# EAGLE board mainboard_rev_b (EAGLE 6.2)
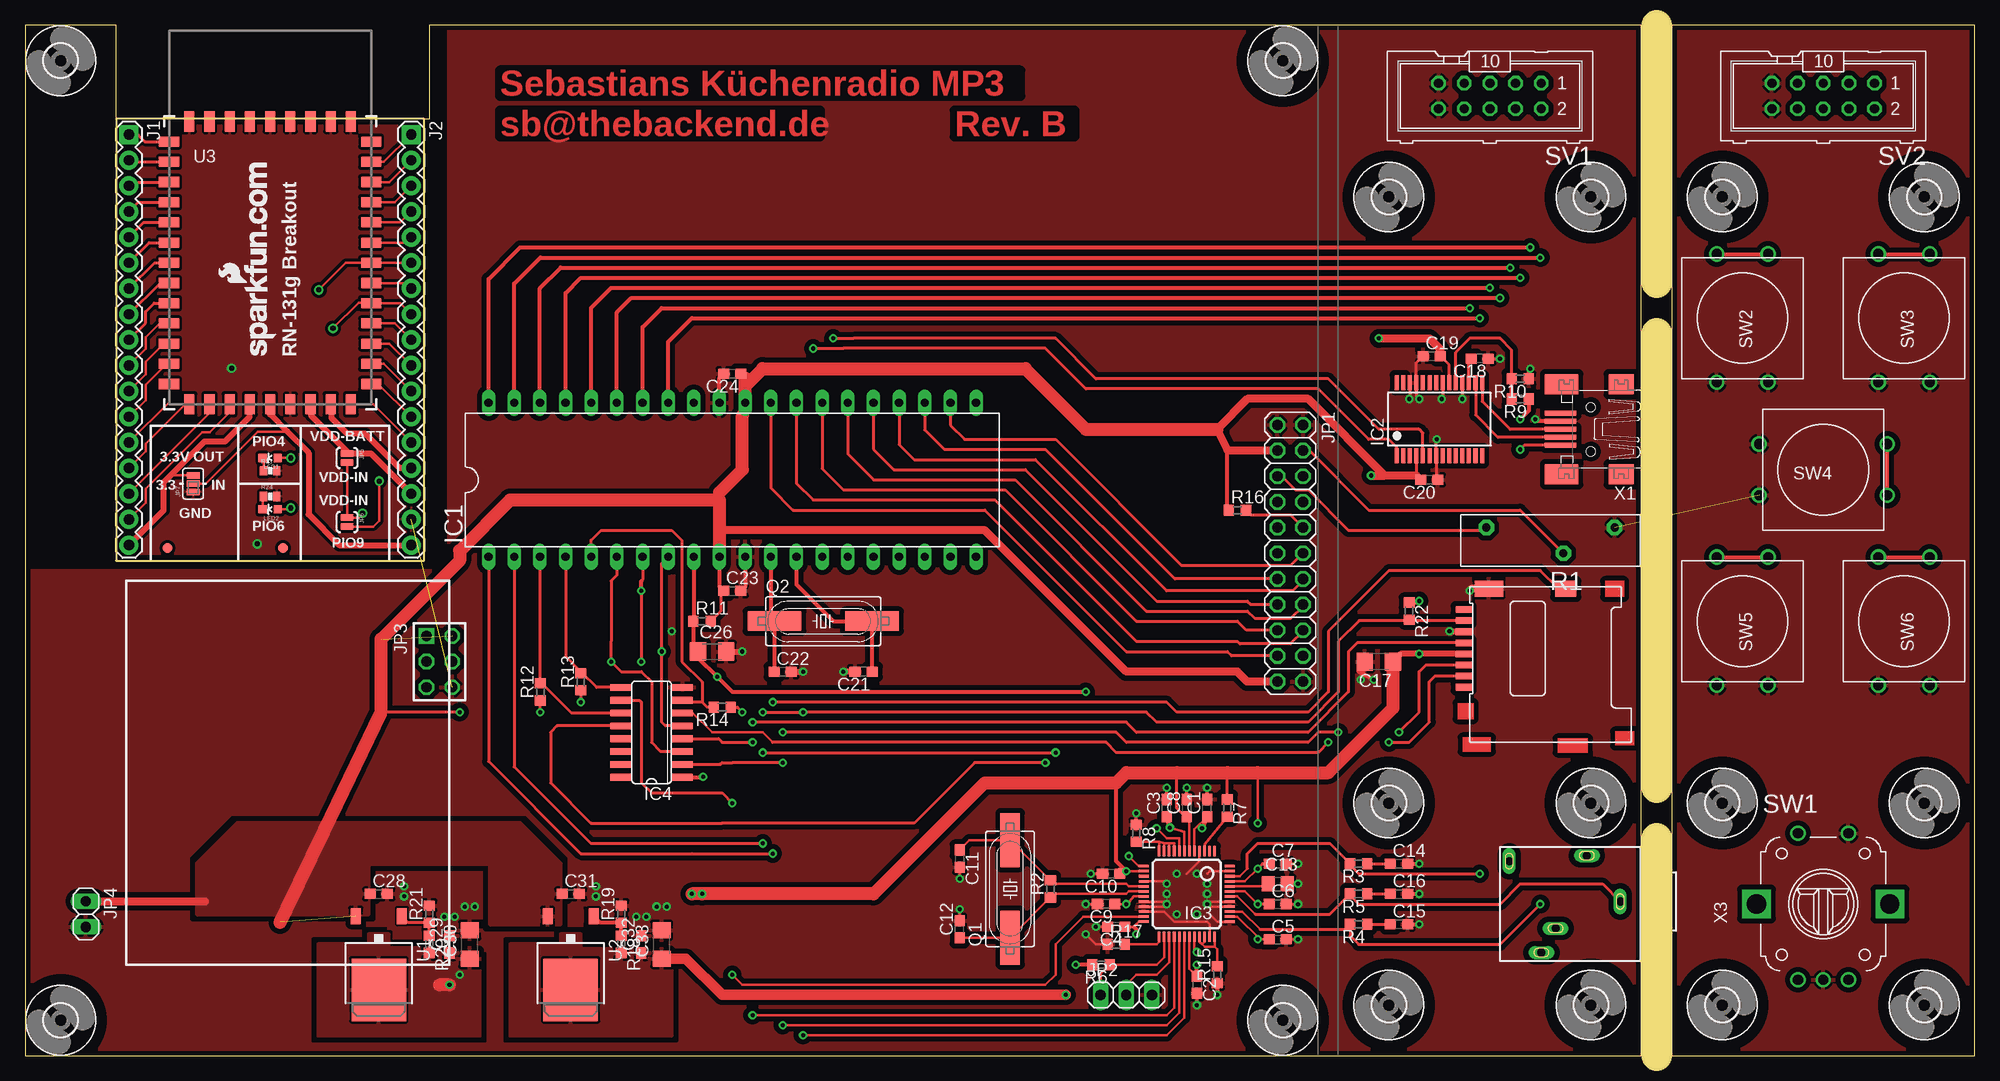
[diagram p0: board, top side]
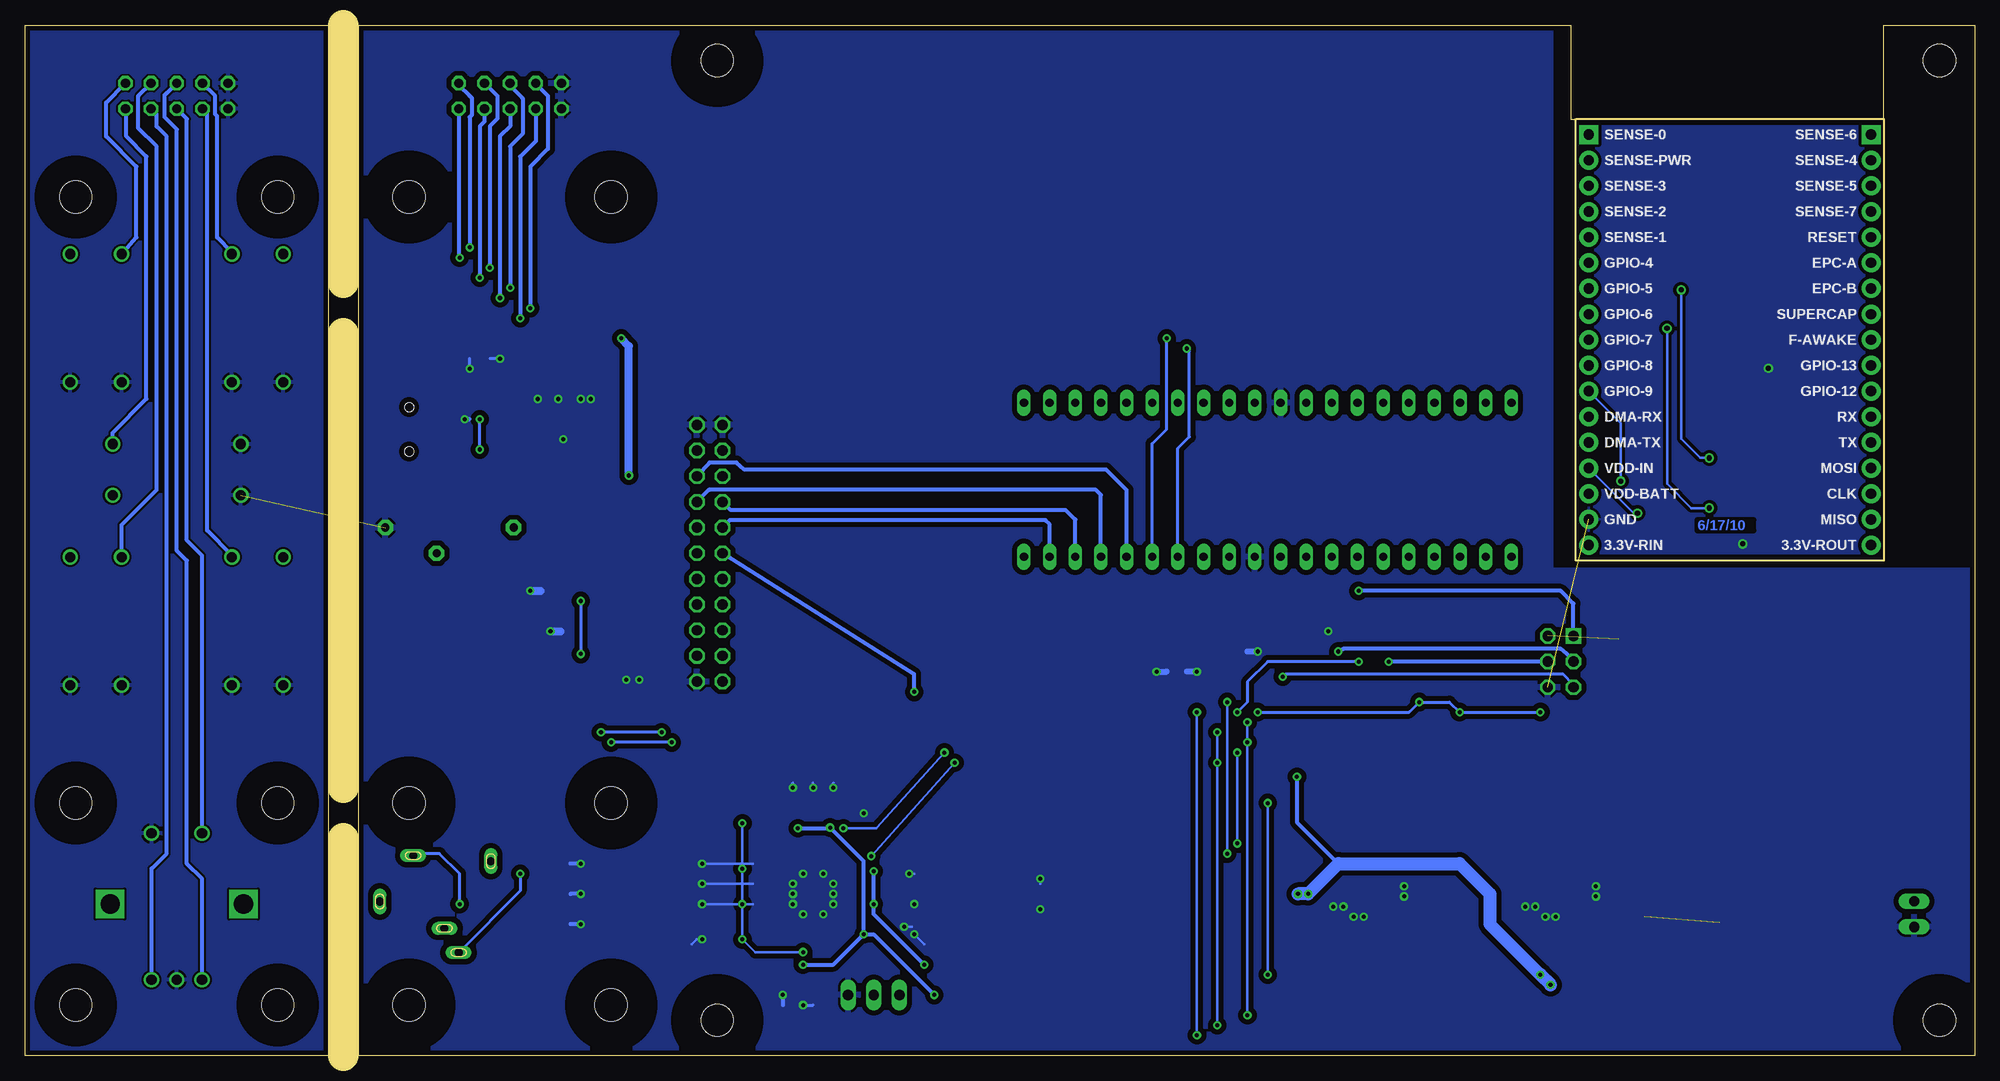
[diagram p1: board, bottom side, seen from below]

Size 193 x 102 mm. Coordinates in mm from the lower left corner, seen from the top.
Outline: 9,92.7 40,92.7 40,102 160,102 160,0 0,0 0,102 9,102 9,92.7
Outline: 9,92.7 9,92.72 39.48,92.72 39.48,49 9,49 9,92.7
Outline: 163,0 193,0 193,102 163,102 163,0
Copper layers (1*16): Top 0.035mm / dielectric 1.5mm / Bottom 0.035mm
Design rules "default *": minimum track width 0.2mm, minimum drill 0.4mm, track to track 0.2mm, track to pad 0.2mm, pad to pad 0.2mm, via to via 0.2mm, smd to smd 0mil, copper to edge 0.5mm, drill to drill 0.5mm, minimum pad ring 10mil, minimum via ring 8mil, stop-mask expansion 4mil, vias tented up to drill 0mil, thermal gap 10mil
Milling: 3 lines

## Footprints (pad centres in the part's own frame; a part is rotated, then mirrored left to right if it is on the bottom)
C0603 = smd 1.1 x 1: 1 -0.85,0; 2 0.85,0
C0805 = smd 1.3 x 1.5: 1 -0.95,0; 2 0.95,0
C1206 = smd 1.6 x 1.8: 1 -1.4,0; 2 1.4,0
3,2 = hole 3.2: 0,0
DIL40 = drill 0.813 long: 1 -24.13,-7.62; 2 -21.59,-7.62; 3 -19.05,-7.62; 4 -16.51,-7.62; 5 -13.97,-7.62; 6 -11.43,-7.62; 7 -8.89,-7.62; 8 -6.35,-7.62; 9 -3.81,-7.62; 10 -1.27,-7.62; 11 1.27,-7.62; 12 3.81,-7.62; 13 6.35,-7.62; 14 8.89,-7.62; 15 11.43,-7.62; 16 13.97,-7.62; 17 16.51,-7.62; 18 19.05,-7.62; 19 21.59,-7.62; 20 24.13,-7.62; 21 24.13,7.62; 22 21.59,7.62; 23 19.05,7.62; 24 16.51,7.62; 25 13.97,7.62; 26 11.43,7.62; 27 8.89,7.62; 28 6.35,7.62; 29 3.81,7.62; 30 1.27,7.62; 31 -1.27,7.62; 32 -3.81,7.62; 33 -6.35,7.62; 34 -8.89,7.62; 35 -11.43,7.62; 36 -13.97,7.62; 37 -16.51,7.62; 38 -19.05,7.62; 39 -21.59,7.62; 40 -24.13,7.62
SSOP28 = smd 0.4 x 1.5: 1 -4.225,-3.625; 2 -3.575,-3.625; 3 -2.925,-3.625; 4 -2.275,-3.625; 5 -1.625,-3.625; 6 -0.975,-3.625; 7 -0.325,-3.625; 8 0.325,-3.625; 9 0.975,-3.625; 10 1.625,-3.625; 11 2.275,-3.625; 12 2.925,-3.625; 13 3.575,-3.625; 14 4.225,-3.625; 15 4.225,3.625; 16 3.575,3.625; 17 2.925,3.625; 18 2.275,3.625; 19 1.625,3.625; 20 0.975,3.625; 21 0.325,3.625; 22 -0.325,3.625; 23 -0.975,3.625; 24 -1.625,3.625; 25 -2.275,3.625; 26 -2.925,3.625; 27 -3.575,3.625; 28 -4.225,3.625
LQFP-48 = smd 0.25 x 1: 1 -2.75,-4.25; 2 -2.25,-4.25; 3 -1.75,-4.25; 4 -1.25,-4.25; 5 -0.75,-4.25; 6 -0.25,-4.25; 7 0.25,-4.25; 8 0.75,-4.25; 9 1.25,-4.25; 10 1.75,-4.25; 11 2.25,-4.25; 12 2.75,-4.25; 25 2.75,4.25; 26 2.25,4.25; 27 1.75,4.25; 28 1.25,4.25; 29 0.75,4.25; 30 0.25,4.25; 31 -0.25,4.25; 32 -0.75,4.25; 33 -1.25,4.25; 34 -1.75,4.25; 35 -2.25,4.25; 36 -2.75,4.25 | smd 1 x 0.25: 13 4.25,-2.75; 14 4.25,-2.25; 15 4.25,-1.75; 16 4.25,-1.25; 17 4.25,-0.75; 18 4.25,-0.25; 19 4.25,0.25; 20 4.25,0.75; 21 4.25,1.25; 22 4.25,1.75; 23 4.25,2.25; 24 4.25,2.75; 37 -4.25,2.75; 38 -4.25,2.25; 39 -4.25,1.75; 40 -4.25,1.25; 41 -4.25,0.75; 42 -4.25,0.25; 43 -4.25,-0.25; 44 -4.25,-0.75; 45 -4.25,-1.25; 46 -4.25,-1.75; 47 -4.25,-2.25; 48 -4.25,-2.75
SO16 = smd 0.66 x 2.032: 1 -4.445,-3.073; 2 -3.175,-3.073; 3 -1.905,-3.073; 4 -0.635,-3.073; 5 0.635,-3.073; 6 1.905,-3.073; 7 3.175,-3.073; 8 4.445,-3.073; 9 4.445,3.073; 10 3.175,3.073; 11 1.905,3.073; 12 0.635,3.073; 13 -0.635,3.073; 14 -1.905,3.073; 15 -3.175,3.073; 16 -4.445,3.073
1X17 = drill 1.016 pad 1.88 square: 1 0,0 | drill 1.016 pad 1.88: 2 2.54,0; 3 5.08,0; 4 7.62,0; 5 10.16,0; 6 12.7,0; 7 15.24,0; 8 17.78,0; 9 20.32,0; 10 22.86,0; 11 25.4,0; 12 27.94,0; 13 30.48,0; 14 33.02,0; 15 35.56,0; 16 38.1,0; 17 40.64,0
2X11 = drill 1.016 octagon: 1 -12.7,-1.27; 2 -12.7,1.27; 3 -10.16,-1.27; 4 -10.16,1.27; 5 -7.62,-1.27; 6 -7.62,1.27; 7 -5.08,-1.27; 8 -5.08,1.27; 9 -2.54,-1.27; 10 -2.54,1.27; 11 0,-1.27; 12 0,1.27; 13 2.54,-1.27; 14 2.54,1.27; 15 5.08,-1.27; 16 5.08,1.27; 17 7.62,-1.27; 18 7.62,1.27; 19 10.16,-1.27; 20 10.16,1.27; 21 12.7,-1.27; 22 12.7,1.27
1X03 = drill 1.016 long: 1 -2.54,0; 2 0,0; 3 2.54,0
AVR-ISP-6 = drill 1.016 square: 1 -2.54,-1.27 | drill 1.016 octagon: 2 -2.54,1.27; 3 0,-1.27; 4 0,1.27; 5 2.54,-1.27; 6 2.54,1.27
1X02 = drill 1.016 long: 1 -1.27,0; 2 1.27,0
SJ_2S-NO = smd 0.635 x 1.27: 1 -0.45,0; 2 0.45,0
SJ_3_PASTE1&2 = smd 0.635 x 1.27: 1 -0.813,0; 2 0,0; 3 0.813,0
LED-0603 = smd 0.8 x 0.8: A 0,-0.75; C 0,0.75
HC49UP = smd 5.334 x 1.93: 1 -4.826,0; 2 4.826,0
PT-SPIN = drill 0.813 pad 1.524 octagon: 1 -6.35,-1.27; 2 6.35,-1.27; 3 -1.27,1.27
R0603 = smd 1 x 1.1: 1 -0.85,0; 2 0.85,0
0402-RES = smd 0.7 x 0.9: 1 -0.65,0; 2 0.65,0
ML10 = drill 0.914 octagon: 1 -5.08,-1.27; 2 -5.08,1.27; 3 -2.54,-1.27; 4 -2.54,1.27; 5 0,-1.27; 6 0,1.27; 7 2.54,-1.27; 8 2.54,1.27; 9 5.08,-1.27; 10 5.08,1.27
PEC12_INCREMENTAL_ENCODER = drill 1: A -2.5,-7.5; B 2.5,-7.5; C 0,-7.5; P1 -2.5,7; P2 2.5,7 | drill 1.9 square: GND@1 -6.6,0; GND@2 6.6,0
PUSHBUTTON_12X12 = drill 1: A@1 -6.35,2.54; A@2 -6.35,-2.54; B@1 6.35,2.54; B@2 6.35,-2.54
TO252 = smd 1 x 1.6: 1 -2.28,-4.8; 2 2.28,-4.8 | smd 5.4 x 6.2: 3 0,2.5
RN-131G = smd 2 x 1: P$1 -10,11; P$2 -10,9; P$3 -10,7; P$4 -10,5; P$5 -10,3; P$6 -10,1; P$7 -10,-1; P$8 -10,-3; P$9 -10,-5; P$10 -10,-7; P$11 -10,-9; P$12 -10,-11; P$13 -10,-13; P$23 10,-13; P$24 10,-11; P$25 10,-9; P$26 10,-7; P$27 10,-5; P$28 10,-3; P$29 10,-1; P$30 10,1; P$31 10,3; P$32 10,5; P$33 10,7; P$34 10,9; P$35 10,11 | smd 1 x 2: P$14 -8,-15; P$15 -6,-15; P$16 -4,-15; P$17 -2,-15; P$18 0,-15; P$19 2,-15; P$20 4,-15; P$21 6,-15; P$22 8,-15; P$36 8,13; P$37 6,13; P$38 4,13; P$39 2,13; P$40 0,13; P$41 -2,13; P$42 -4,13; P$43 -6,13; P$44 -8,13
FIDUCIAL-1X2 = smd 1 x 1: 1 0,0
32005-301 = smd 3.1 x 0.5: 1 3,1.6; 2 3,0.8; 3 3,0; 4 3,-0.8; 5 3,-1.6 | smd 2.5 x 2: M1 -3,-4.45; M2 -3,4.45 | smd 3.3 x 2: M3 2.9,4.45; M4 2.9,-4.45 | hole 0.9: 0,2.2; 0,-2.2
MICRO-SD = smd 0.65 x 1.6: 1 -10.54,16.6; 2 -9.44,16.6; 3 -8.34,16.6; 4 -7.24,16.6; 5 -6.14,16.6; 6 -5.04,16.6; 7 -3.94,16.6; 8 -2.84,16.6 | smd 1.6 x 2.1: K1 -0.8,6.5 | smd 1.6 x 2.8: K2 -0.8,14.1
1503_09 = drill 0.8 pad 1.2 long: 1 0,-2.1; 2 -4.55,-5.4; 3 5.05,-9.9; 4 -4,-13.1; 5 2.65,-8.5

## Placement (x,y rotation side)
C1  100n  [C0603]  117,24.5 90 top
C2  100n  [C0603]  116,7 270 top
C3  100n  [C0603]  113,24.5 90 top
C4  100n  [C0603]  108,12.75 180 top
C5  100n  [C0603]  124,11.5 0 top
C6  100n  [C0603]  124,15 0 top
C7  100n  [C0603]  124,19 0 top
C8  100n  [C0603]  115,24.5 90 top
C9  100n  [C0603]  107,15 180 top
C10  100n  [C0603]  107.5,18 180 top
C11  33p  [C0603]  92.5,19.5 270 top
C12  33p  [C0603]  92.5,12.5 90 top
C13  1u  [C0805]  124,17 0 top
C14  10n  [C0603]  136,19 0 top
C15  10n  [C0603]  136,13 0 top
C16  47n  [C0603]  136,16 0 top
C17  [C1206]  134,39 180 top
C18  100n  [C0603]  144,69 180 top
C19  100n  [C0603]  139.25,69.25 0 top
C20  100n  [C0603]  139,57 180 top
C21  33p  [C0603]  83,38 180 top
C22  33p  [C0603]  75,38 0 top
C23  100n  [C0603]  70,46 0 top
C24  100n  [C0603]  70,67.5 180 top
C26  10u  [C1206]  68,40 0 top
C28  100n  [C0603]  35,16 0 top
C29  100n  [C0603]  42,11 90 top
C30  [C1206]  44,11 90 top
C31  100n  [C0603]  54,16 0 top
C32  100n  [C0603]  61,11 90 top
C33  [C1206]  63,11 90 top
H1  MOUNT-HOLE3.2  [3,2]  3.5,98.5 0 top
H2  MOUNT-HOLE3.2  [3,2]  3.5,3.5 0 top
H3  MOUNT-HOLE3.2  [3,2]  124.5,3.5 0 top
H4  MOUNT-HOLE3.2  [3,2]  124.5,98.5 0 top
H5  MOUNT-HOLE3.2  [3,2]  135,25 0 top
H6  MOUNT-HOLE3.2  [3,2]  135,5 0 top
H7  MOUNT-HOLE3.2  [3,2]  155,5 0 top
H8  MOUNT-HOLE3.2  [3,2]  155,25 0 top
H9  MOUNT-HOLE3.2  [3,2]  168,25 0 top
H10  MOUNT-HOLE3.2  [3,2]  168,5 0 top
H11  MOUNT-HOLE3.2  [3,2]  188,5 0 top
H12  MOUNT-HOLE3.2  [3,2]  188,25 0 top
H13  MOUNT-HOLE3.2  [3,2]  168,85 0 top
H14  MOUNT-HOLE3.2  [3,2]  188,85 0 top
H15  MOUNT-HOLE3.2  [3,2]  135,85 0 top
H16  MOUNT-HOLE3.2  [3,2]  155,85 0 top
IC1  MEGA164P/324P/644P-PU  [DIL40]  70,57 0 top
IC2  FT232RL  [SSOP28]  140,63 0 top
IC3  VS1053  [LQFP-48]  115,16 180 top
IC4  4050D  [SO16]  62,32 90 top
J1  M17  [1X17]  10.27,91.18 270 top
J2  M17  [1X17]  38.21,91.18 270 top
JP1  [2X11]  125.23,49.73 270 top
JP2  [1X03]  109,6 0 top
JP3  AVR-ISP-6VERT  [AVR-ISP-6]  41,39 270 top
JP4  [1X02]  6,14 270 top
JP5  [SJ_2S-NO]  31.86,59.16 270 top
JP6  [SJ_2S-NO]  31.86,52.81 270 top
JP7  JUMPER-31-2  [SJ_3_PASTE1&2]  16.62,56.62 90 top
LED1  GREEN  [LED-0603]  24.24,59.16 90 top
LED2  RED  [LED-0603]  24.24,54.08 90 top
Q1  [HC49UP]  97.5,16.5 90 top
Q2  [HC49UP]  79,43 0 top
R1  [PT-SPIN]  151,51 180 top
R2  [R0603]  101.5,16.5 90 top
R3  20  [R0603]  132,19 180 top
R4  20  [R0603]  132,13 180 top
R5  10  [R0603]  132,16 180 top
R6  10k  [R0603]  106.5,9 180 top
R7  10k  [R0603]  119,24.5 270 top
R8  10k  [R0603]  110,22 270 top
R9  4k7  [R0603]  148,65 180 top
R10  10k  [R0603]  148,67 180 top
R11  10k  [R0603]  67,43 0 top
R12  10k  [R0603]  51,36 90 top
R13  10k  [R0603]  55,37 90 top
R14  10k  [R0603]  69,34.5 180 top
R15  10k  [R0603]  118,8 90 top
R16  10k  [R0603]  120,54 0 top
R17  10k  [R0603]  108,11 0 top
R18  4k7  [R0603]  59,11 270 top
R19  2k2  [R0603]  59,14 90 top
R20  2k8  [R0603]  40,11 270 top
R21  4k7  [R0603]  40,14 90 top
R22  10k  [R0603]  137,44 270 top
R23  220  [0402-RES]  24.24,57.89 0 top
R24  220  [0402-RES]  24.24,55.35 0 top
SV1  [ML10]  145,95 180 top
SV2  [ML10]  178,95 180 top
SW1  ENCODER_SW1-PEC12  [PEC12_INCREMENTAL_ENCODER]  178,15 0 top
SW2  PUSHBUTTON_12X12  [PUSHBUTTON_12X12]  170,73 90 top
SW3  PUSHBUTTON_12X12  [PUSHBUTTON_12X12]  186,73 90 top
SW4  PUSHBUTTON_12X12  [PUSHBUTTON_12X12]  178,58 0 top
SW5  PUSHBUTTON_12X12  [PUSHBUTTON_12X12]  170,43 90 top
SW6  PUSHBUTTON_12X12  [PUSHBUTTON_12X12]  186,43 90 top
U1  TS1117DT  [TO252]  35,9 180 top
U2  TS1117DT  [TO252]  54,9 180 top
U3  RN-131G  [RN-131G]  24.24,79.48 0 top
U$1  LOGO-SFENEW  [SFE-NEW-WEBLOGO]  24.83,69.34 90 top
U$2  FIDUCIAL1X2  [FIDUCIAL-1X2]  14.08,50.27 0 top
U$3  FIDUCIAL1X2  [FIDUCIAL-1X2]  25.51,50.27 0 top
U$4  CREATIVE_COMMONS  [CREATIVE_COMMONS]  22.97,60.43 0 top
X1  MINI-USB-32005-301  [32005-301]  155,62 180 top
X2  MICRO-SD  [MICRO-SD]  159,47 90 top
X3  1503_09  [1503_09]  160,15.25 270 top

## Library data of the parts
C1-C24 C26 C28-C33 R1-R22 = rcl
H1-H16 = holes
IC1 JP3 = avr-7
IC2 = ftdichip; MPN: FT232RL; OC_FARNELL: 1146032; OC_NEWARK: 91K9918
IC3 X2 = welectronic
IC4 = 40xx
J1 J2 JP5-JP7 LED1 LED2 R23 R24 U3 U$1-U$4 = SparkFun
JP1 JP2 JP4 = pinhead
Q1 Q2 = crystal; OC_FARNELL: unknown; OC_NEWARK: unknown
SV1 SV2 = con-harting-ml; OC_FARNELL: unknown; OC_NEWARK: unknown
SW1 = dp_devices
SW2-SW6 U1 U2 = sebastian
X1 = con-cypressindustries; OC_FARNELL: unknown; OC_NEWARK: unknown
X3 = con-lumberg; OC_FARNELL: 1243244; OC_NEWARK: unknown

## Nets
3.3V-RIN: J2.17 JP7.2 U3.P$18
3.3V-ROUT: J1.17 JP7.3 U3.P$17
!CE: IC1.17 JP1.8
!HALT: JP1.10 R16.2
!RD: IC1.18 JP1.7
!RESET: C26.1 IC1.9 JP1.11 JP3.5 R11.1
!WR: IC1.16 JP1.6
+1V8: C1.1 C2.1 C3.1 C4.1 C32.1 C33.1 IC3.5 IC3.7 IC3.24 IC3.31 R18.2 U2.3
+3V3: C5.1 C6.1 C7.1 C8.1 C9.1 C10.1 C17.1 C29.1 C30.1 IC3.6 IC3.14 IC3.19 IC3.32 IC3.38 IC3.43 IC3.45 IC4.1 R6.2 R7.1 R20.2 R22.1 U1.3 X2.4
+5V: C19.2 C20.2 C23.1 C24.1 C28.1 C31.1 IC1.10 IC1.30 IC2.4 IC2.20 JP1.3 JP1.21 JP3.2 JP4.1 R11.2 R12.1 R13.1 R14.1 R16.1 U1.2 U2.2
AREF: IC1.32
C/!D: IC1.19 JP1.9
CLK: J1.15 U3.P$15
CS_!DCS!_I: IC1.3 IC4.11 R12.2
CS_INS: IC1.1 X2.K1
DB0: IC1.22 JP1.12
DB1: IC1.23 JP1.13
DB2: IC1.24 JP1.14
DB3: IC1.25 JP1.15
DB4: IC1.26 JP1.16
DB5: IC1.27 JP1.17
DB6: IC1.28 JP1.18
DB7: IC1.29 JP1.19
DMA-RX: J2.12 U3.P$23
DMA-TX: J2.13 U3.P$22
EPC-A: J1.6 U3.P$6
EPC-B: J1.7 U3.P$7
F_AWAKE: J1.9 U3.P$9
FTDI_RXD_IN: IC1.15 IC2.5
FTDI_TXD_OUT: IC1.14 IC2.1
GBUF: IC3.42 R5.2 X3.1
GND: C1.2 C2.2 C3.2 C4.2 C5.2 C6.2 C7.2 C8.2 C9.2 C10.2 C11.2 C12.2 C13.2 C14.2 C15.2 C16.2 C17.2 C18.1 C19.1 C20.1 C21.2 C22.2 C23.2 C24.2 C26.2 C28.2 C29.2 C30.2 C31.2 C32.2 C33.2 IC1.11 IC1.31 IC2.7 IC2.18 IC2.21 IC2.25 IC2.26 IC3.4 IC3.16 IC3.20 IC3.21 IC3.22 IC3.35 IC3.37 IC3.40 IC3.41 IC3.47 IC4.8 J2.16 JP1.1 JP1.2 JP1.22 JP2.3 JP3.6 JP4.2 JP7.1 R1.1 R8.1 R10.1 R15.1 R17.1 R19.2 R21.2 R23.2 R24.2 SV1.9 SV1.10 SV2.9 SV2.10 SW1.C SW1.P2 SW2.A@1 SW2.A@2 SW3.A@1 SW3.A@2 SW4.A@1 SW4.A@2 SW5.A@1 SW5.A@2 SW6.A@1 SW6.A@2 U3.P$19 U3.P$36 U3.P$37 U3.P$38 U3.P$39 U3.P$40 U3.P$41 U3.P$42 U3.P$43 U3.P$44 X1.4 X2.6 X2.K2
GPIO-4: J2.6 LED1.A U3.P$29
GPIO-5: J2.7 U3.P$28
GPIO-6: J2.8 LED2.A U3.P$27
GPIO-7: J2.9 U3.P$26
GPIO-8: J2.10 U3.P$25
GPIO-9: J2.11 JP6.2 U3.P$24
GPIO-12: J1.11 U3.P$11
GPIO-13: J1.10 U3.P$10
LCD_VEE: JP1.5 R1.2
LEFT: IC3.46 R3.2 X3.3
MISO: IC1.7 IC3.30 JP3.1 R22.2 X2.7
MISO1: J1.16 U3.P$16
MOSI: IC1.6 IC4.3 JP3.4
MOSI1: J1.14 U3.P$14
MOSI_3V: IC3.29 IC4.2 X2.3
N$1: JP1.4 R1.3
N$2: C13.1 IC3.44
N$3: IC3.9 IC3.10 IC3.11 IC3.12 R8.2
N$4: IC3.33 IC3.34 IC3.36 R15.2
N$6: C14.1 R3.1
N$7: C15.1 R4.1
N$8: C11.1 IC3.17 Q1.2 R2.2
N$9: C16.1 R5.1
N$10: C12.1 IC3.18 Q1.1 R2.1
N$11: IC3.3 R7.2
N$13: LED2.C R24.1
N$14: LED1.C R23.1
N$16: C18.2 IC2.17
N$17: IC2.16 X1.2
N$18: IC2.15 X1.3
N$19: R9.1 X1.1
N$20: IC2.19 R9.2 R10.2
N$21: C21.1 IC1.13 Q2.2
N$22: C22.1 IC1.12 Q2.1
N$24: IC3.25 R17.2
N$25: R20.1 R21.1 U1.1
N$26: R18.1 R19.1 U2.1
RESET: J1.5 U3.P$5
RIGHT: IC3.39 R4.2 X3.2
RX: J1.12 U3.P$12
S_CAP: J1.8 U3.P$8
SCK: IC1.8 IC4.5 JP3.3
SCK_3V: IC3.28 IC4.4 X2.5
SD_!CS: IC4.6 X2.2
SD_!CS!_I: IC1.5 IC4.7 R14.2
SEN0: J2.1 U3.P$34
SEN1: J2.5 U3.P$30
SEN2: J2.4 U3.P$31
SEN3: J2.3 U3.P$32
SEN4: J1.2 U3.P$2
SEN5: J1.3 U3.P$3
SEN6: J1.1 U3.P$1
SEN7: J1.4 U3.P$4
SENSE-PWR: J2.2 U3.P$33
SW_0: IC1.40 SV1.1
SW_1: IC1.39 SV1.2
SW_2: IC1.38 SV1.3
SW_3: IC1.37 SV1.4
SW_4: IC1.36 SV1.5
SW_5: IC1.35 SV1.6
SW_6: IC1.34 SV1.7
SW_7: IC1.33 SV1.8
SW_A: SV2.7 SW2.B@1 SW2.B@2
SW_B: SV2.1 SW3.B@1 SW3.B@2
SW_C: SV2.2 SW4.B@1 SW4.B@2
SW_D: SV2.8 SW5.B@1 SW5.B@2
SW_E: SV2.3 SW6.B@1 SW6.B@2
SW_F: SV2.5 SW1.A
SW_G: SV2.4 SW1.B
SW_H: SV2.6 SW1.P1
TX: J1.13 U3.P$13
VDD-BATT: J2.15 JP5.1 U3.P$20
VDD-IN: J2.14 JP5.2 JP6.1 U3.P$21
VS_!CS: IC3.23 IC4.10
VS_!CS!_I: IC1.4 IC4.9 R13.2
VS_!DCS: IC3.13 IC4.12
VS_!DREQ: IC1.2 IC3.8
VS_RXD: IC3.26 JP2.1 R6.1
VS_TXD: IC3.27 JP2.2

## Tracks (layer width: path | path; a pad name or v marks a point on that pad's centre or on a via)
3.3V-RIN
  Top 0.254: 24.24,63.48 U3.P$18 | 25.95,61.76 23.03,61.76 17.89,56.62 JP7.2
  Top 0.61: J2.17 31.08,50.54 28.05,53.57 28.05,59.67 25.95,61.76 24.24,63.48 24.24,64.49
3.3V-ROUT
  Top 0.254: JP7.3 14.38,57.43 14.33,57.38
  Top 0.61: J1.17 13.7,53.97 13.7,56.75 14.33,57.38 17.76,60.81 19.8,60.81 22.21,63.22 22.21,64.45 U3.P$17
!CE
  Bottom 0.406: IC1.17 86.51,55.51 87,56 125.31,56 JP1.8
!HALT
  Top 0.305: JP1.10 126.5,52.3 125.3,53.5 121.35,53.5 R16.2
!RD
  Bottom 0.406: IC1.18 89.05,53.05 90,54 123.15,54 JP1.7
!RESET  (via drill 0.4)
  Top 0.406: IC1.9 66.19,43.96 R11.1 66.15,40.45 C26.1 66.6,39.4 v68.5,37.5 70,36 v105,36
  Bottom 0.31: JP3.5 39.73,36.73 40.75,37.75 68.25,37.75 v68.5,37.5
  Bottom 0.406: v105,36 105,37.77 JP1.11
!WR
  Bottom 0.406: IC1.16 83.97,55.97 86,58 121.8,58 122.6,58.7 125.25,58.7 JP1.6
+1V8  (via drill 0.4)
  Top 0.25: IC3.7 114.75,22.15 v113.33,22.57 | IC3.5 115.75,22.4 C1.1 | IC3.24 110.25,13.25 110,13 | IC3.31 115.25,8.6 C2.1
  Top 0.305: C4.1 109.75,12.75 110,13
  Top 0.406: C1.1 v116.5,22.5 | v113.33,22.57 C3.1 | C2.1 v116,9 | v110,12 110,12.5 109.75,12.75
  Top 1.016: v103,6 69,6 65.4,9.6 C33.1
  Bottom 0.406: v116.5,22.5 113.5,22.5 v113.33,22.57 110,19.25 v110,12 | v116,9 113,9 v110,12 | v110,12 109,12 v103,6
  pour Top: 53,12 53,11 48,11 48,2 64,2 64,10.5 55,10.5 55,12
+3V3  (via drill 0.4)
  Top 0.25: IC3.45 120.75,17.25 v122,18.5 | v122,15 120.75,16.25 IC3.43 | IC3.6 115.25,23.4 C8.1 | C5.1 122.25,11.5 | IC3.38 120,13.75 122.25,11.5 | IC3.19 109.75,15.75 109.1,15 | 109.1,15 C9.1 | 122.25,11.5 v122,11.5 | v122,23 122,28 | IC3.14 v109,18.25 | v109,18.25 108.6,18.25 C10.1 | 109.1,15 109.1,15.1 v109,15 | v109,18.25 108.5,18.25 | IC3.32 115.75,10.5 v116,10.25
  Top 0.305: v122,18.5 122.5,19 C7.1 | C6.1 v122,15 | C8.1 114.85,23.65 114,24.5 114,28 | R7.1 119,28 | R22.1 137.85,44.85 v138,45
  Top 0.406: C10.1 108.35,18.4 | 108,27 108,19.25 v109,18.25 | R6.2 v104,9 | IC4.1 67.1,27.55 v67.1,27.6
  Top 0.61: X2.4 v138,39.76 136.16,39.76 C17.1
  Top 1.27: C17.1 135.4,34.4 129,28 122,28 119,28 114,28 109,28 108,27 95,27 84,16 v67,16 v66,16 | v42,7 41,7
  Bottom 0.25: v122,23 v122,18.5 v122,15 v122,11.5 120.75,10.25 v116,10.25
  Bottom 0.305: v138,45 v138,39.76
  Bottom 0.4: v109,15 v109,18.25
  Bottom 0.406: v104,9 109,14 v109,15 | v67.1,27.6 67.1,23.1 63,19
  Bottom 1.27: v42,7 v43,8 48,13 48,16 51,19 63,19 v66,16 v67,16
  pour Top: 34,12 34,11 29,11 29,2 45,2 45,10.6 36,10.6 36,12
+5V  (via drill 0.4)  (2 unrouted)
  Top 0.305: IC2.20 140.97,68.38 C19.2 | IC2.4 137.72,57.42 C20.2 | C23.1 68.85,45.7 68.85,44 R11.2 | 71,63.35 71,64.35 IC1.30 | 119,54.25 119,54.15 R16.1
  Top 0.31: R13.1 v55,35 | v51,34 R12.1 | v43,34 35.22,34 | R14.1 70.5,34.5 v71,34
  Top 0.406: IC1.10 68.73,46.42 C23.1 | 71.27,67.08 C24.1 | 119,54.25 119,60
  Top 0.813: 68.73,55 68.73,55.73 | IC1.30 71.27,66.27 | JP1.3 119.11,59.89 119,60 118,62 121,65 127,65 134.57,57.42 | 137.72,57.42 134.57,57.42 | v133.24,57.42 134.57,57.42 | v134,71 139,71 140.1,69.9 C19.2 | JP4.1 17.78,15.27 | JP1.21 120.97,37.03 120,38 109,38 95,52 68.73,52
  Top 1.27: IC1.30 71.27,67.08 | 68.73,55.73 71,58 71,63.35 | 71.27,66.27 73,68 99,68 105,62 118,62 | 25.22,13.18 35.22,34 35.22,41.22 43,49 43,50 48,55 68.73,55 68.73,52 IC1.10
  Bottom 0.31: v43,34 v51,34 52,35 v55,35 56,34 v71,34
  Bottom 0.813: 71,64.35 IC1.30 | v133.24,57.42 133.24,70.24 v134,71 | 5.84,15.43 JP4.1
  pour Top: 17,14 34,14 34,19 46,19 46,13 53,13 53,19 49,23 21,23 17,19
C/!D
  Bottom 0.406: IC1.19 91.59,52.59 92,53 123.23,53 JP1.9
CLK
  Top 0.254: U3.P$15 18.24,63.59 J1.15
CS_!DCS!_I
  Top 0.305: IC1.3 50.95,37.05 51,37 54.09,33.91 IC4.11
  Top 0.31: R12.2 51,37
CS_INS  (via drill 0.4)
  Top 0.305: IC1.1 45.87,29.13 55,20 66,20 | X2.K1 151.8,46.2 150,48 135,48 129,42 129,36 127,34 114,34
  Top 0.31: 114,34 113,35 v74,35 | 66,20 v74,20
  Bottom 0.25: v74,20 v74,35
DB0
  Top 0.305: JP1.12 126.48,49.73 125.25,48.5 114.5,48.5 102,61 93,61 91.59,62.41 IC1.22
DB1
  Top 0.305: IC1.23 89.05,61.95 91,60 101,60 113.81,47.19 JP1.13
DB2
  Top 0.305: JP1.14 126.5,47 125.5,46 113,46 100,59 88,59 86.51,60.49 IC1.24
DB3
  Top 0.305: JP1.15 121.35,44.65 121,45 112,45 99,58 86,58 83.97,60.03 IC1.25
DB4
  Top 0.305: JP1.16 126.5,44.5 125.25,43.25 121.75,43.25 121,44 111,44 98,57 84,57 81.43,59.57 IC1.26
DB5
  Top 0.305: JP1.17 120.89,42.11 120,43 110,43 97,56 81,56 78.89,58.11 IC1.27
DB6
  Top 0.305: JP1.18 126.5,42 125.25,40.75 120.25,40.75 120,41 110,41 96,55 78,55 76.35,56.65 IC1.28
DB7
  Top 0.305: JP1.19 119.43,39.57 119,40 109,40 95,54 76,54 73.81,56.19 IC1.29
DMA-RX
  Top 0.254: U3.P$23 34.97,66.48 J2.12
DMA-TX
  Top 0.254: U3.P$22 34.43,64.48 J2.13
EPC-A
  Top 0.305: U3.P$6 12.27,80.48 J1.6
EPC-B
  Top 0.305: U3.P$7 12.81,78.48 J1.7
F_AWAKE
  Top 0.305: U3.P$9 12.76,74.48 11.92,73.64 11.92,72.51 J1.9
FTDI_RXD_IN  (via drill 0.4)
  Top 0.305: IC2.5 138.38,61.62 138,62 134,62 129,67 106,67 102,71 82,71
  Top 0.31: v80,71 82,71
  Bottom 0.31: IC1.15 81.43,60.57 80,62 v80,71
FTDI_TXD_OUT  (via drill 0.4)
  Top 0.305: IC2.1 135.78,60.23 135,61 133,61 128,66 105,66 101,70 81,70
  Top 0.31: v78,70 81,70
  Bottom 0.31: IC1.14 78.89,60.11 77.75,61.25 77.75,69.75 v78,70
GBUF
  Top 0.25: IC3.42 120,15.75 121.75,14
  Top 0.305: 121.75,14 129.15,14 R5.2 131.15,15.85 132,15 146,15 148,17 156.15,17 X3.1
GND  (via drill 0.4, 0.51)  (2 unrouted)
  Top 0.25: IC3.22 112.75,14.25 113.75,13.25 117,13.25 117.25,13 IC3.35 | IC3.21 112.75,14.75 v113,15 112.75,15.25 IC3.20 | IC3.16 112.75,17.25 v113,17 | IC3.4 116.25,19.25 115,18 | C11.2 v92.5,17.5 | C12.2 v92.5,14.5 | C9.2 v105,15 | C4.2 v106,12.75 | C10.2 v105.5,18 | R17.1 106,11 v105,12 | IC3.37 118,13.25 117.25,14 | IC3.40 117.25,14.75 v117,15 117.25,15.25 IC3.41 | IC3.47 117.25,18.25 117,18 | C6.2 v126,15 | C7.2 v126,19 | C5.2 v126,11.5 | C13.2 v126,17
  Top 0.305: IC2.26 137.07,65.08 v137,65 | v138,65 137.72,65.28 IC2.25 137.72,68.58 C19.1 | IC2.21 140.32,65.08 v140.25,65 | IC2.18 142.28,65.03 v142.25,65 | v139.75,61 139.68,60.92 IC2.7 139.68,57.17 C20.1 | R10.1 148.85,67.85 v149,68 | C18.1 v146,69 | C1.2 v117,26.5 | C8.2 v115,26.5 | C3.2 v113,26.5 | R8.1 v110,24
  Top 0.31: C2.2 v116,5
  Top 0.406: IC1.11 71.27,46.42 C23.2 | IC1.31 68.73,67.08 C24.2 | C17.2 v132.2,37.2 | v133.5,37.2 132,38 133,39 | X1.4 149.7,62.8 v149.5,63 | C14.2 v138,19 | C15.2 v138,13 | C16.2 v138,16 | R15.1 v118,6
  Top 0.6: C26.2 v71,40 | C22.2 v77,38 | C21.2 v81,38
  Top 0.61: X2.6 141.04,41.96
  Top 0.813: X2.K2 143.2,46.2 v143,46 | 141.04,41.96 v141,42
  Bottom 0.25: v92.5,17.5 92.5,17 | v92.5,14.5 92.5,14.75 | v106,12.75 105.25,12.75 | v105.5,18 105,18 | v105,12 104,11 | v126,15 121,15 | v126,19 121,19 | v126,11.5 126.5,11.5 127,11 | v126,17 121,17
  Bottom 0.305: v149,68 149,69 | v146,69 147,69 | v117,26.5 117,27 | v115,26.5 115,27 | v113,26.5 113,27
  Bottom 0.31: v116,5 115,5
  Bottom 0.406: v149.5,63 149,63 | v138,19 139,19 | v138,13 139,13 | v138,16 139,16 | v118,6 118,5
  Bottom 0.6: v71,40 72,40 | v77,38 78,38 | v81,38 80,38
  Bottom 0.813: v143,46 142,46 | v141,42 140,42
  other vias: 37.5,15.75 37.5,16.75 56.5,16.75 56.5,15.75 60.5,13.75 61.5,13.75 62.5,14.75 63.5,14.75 117,16 114,18 116,18 117,17 114,14 116,14 113,16 44.5,14.75 43.5,14.75 42.5,13.75 41.5,13.75 64,42 22.97,50.65 20.43,68.05
  pour Bottom (isolate 0.5, rank 6): 0,48 42,48 42,102 160,102 160,0 0,0
  pour Bottom: 163,102 193,102 193,0 163,0
  pour Top (rank 6): 112,19 118,19 118,13 112,13
  pour Top (rank 6): 36,18 36,11.7 45,11.7 45,18
  pour Top (rank 6): 55,18 55,15 56,15 56,12 64,12 64,18
  pour Top (isolate 0.5, rank 6): 0,48 42,48 42,102 160,102 160,0 0,0
  pour Top (isolate 0.5): 163,102 193,102 193,0 163,0
  pour Top (isolate 0.305): 9,49 39.48,49 39.48,92.72 9,92.72
  pour Bottom (isolate 0.305): 9,49 39.48,49 39.48,92.72 9,92.72
GPIO-4  (via drill 0.51)
  Top 0.254: J2.6 U3.P$29 34.22,78.46 31.73,78.46 v29.07,75.8 | LED1.A v26.27,59.16
  Bottom 0.254: v26.27,59.16 27.16,59.16 29.07,61.06 v29.07,75.8
GPIO-5
  Top 0.254: U3.P$28 37.67,76.48 J2.7
GPIO-6  (via drill 0.51)
  Top 0.254: J2.8 37.13,74.48 U3.P$27 34.19,74.53 33,74.53 v30.46,71.99 | LED2.A 26.14,54.08 v26.27,54.21
  Bottom 0.254: v26.27,54.21 28.05,54.21 30.46,56.62 v30.46,71.99
GPIO-7
  Top 0.254: U3.P$26 36.59,72.48 J2.9
GPIO-8
  Top 0.254: U3.P$25 36.05,70.48 J2.10
GPIO-9  (via drill 0.51)
  Top 0.254: U3.P$24 35.51,68.48 J2.11 | JP6.2 34.46,52.36 35.03,52.94 v35.03,56.87
  Bottom 0.254: v35.03,56.87 35.03,62.6 J2.11
GPIO-12
  Top 0.254: U3.P$11 13.72,70.48 11.92,68.69 11.92,67.43 J1.11
GPIO-13
  Top 0.254: U3.P$10 13.3,72.48 11.92,71.1 11.92,69.97 J1.10
LCD_VEE
  Top 0.305: JP1.5 124.4,57.35 125.75,56 127,56 131,52 143.92,52 R1.2
LEFT  (via drill 0.4)
  Top 0.25: IC3.46 120.25,17.75 121,18.5
  Top 0.305: 121,18.5 121,20 122,21 129.15,21 R3.2 131.15,18.85 132,18 v144,18
  Bottom 0.305: v144,18 144,16.3 X3.3
MISO  (via drill 0.4)
  Top 0.25: IC3.30 114.75,3.75 113,2 v77,2
  Top 0.305: X2.7 137,43.06 | 137,43.06 132.06,43.06 130,41 130,36 127,33 112,33 | IC1.7 61.11,47.11 61,47 | v61,46 v61,39 | v73,34 v77,34 | R22.2 137,43.06
  Top 0.31: 112,33 111,34 v77,34
  Top 0.406: v61,46 61,47
  Bottom 0.25: v77,2 v77,34
  Bottom 0.305: v61,39 70,39 72,37 72,35 v73,34
  Bottom 0.406: JP3.1 39.73,44.73 41,46 v61,46
MISO1
  Top 0.254: U3.P$16 20.24,63.67 18.27,61.7 17.51,61.7 11.92,56.11 11.92,54.73 J1.16
MOSI  (via drill 0.4)
  Top 0.305: IC1.6 58.57,47.57 58,47 58,41 | v58,39 59,38 61,38 62,37 62,31 62.91,30.09 IC4.3
  Top 0.31: v58,39 58,41
  Bottom 0.406: JP3.4 v58,39
MOSI1
  Top 0.254: U3.P$14 15.84,64.48 11.92,60.56 11.92,59.81 J1.14
MOSI_3V  (via drill 0.4)
  Top 0.25: IC3.29 114.25,4.25 113,3 v75,3
  Top 0.305: IC4.2 68.83,28.82 69,29 70,29 | v130,32 128,32 127,31 109,31 108,32 | v136,32 138,34 138,38 138.66,38.66
  Top 0.31: 108,32 v75,32 | v75,29 70,29 | X2.3 138.66,38.66
  Bottom 0.25: v75,3 v75,29 v75,32
  Bottom 0.305: v130,32 v136,32
N$1
  Top 0.305: R1.3 148,54 133,54 127,60 126.5,60 JP1.4
N$2
  Top 0.25: IC3.44 122.8,16.75
  Top 0.305: 122.8,16.75 C13.1
N$3
  Top 0.25: IC3.12 112.25,21.15 | 112.25,21.15 R8.2 | IC3.11 112.75,21 | 112.75,21 112.25,21.15 | IC3.10 113.25,21 | 113.25,21 112.75,21 | IC3.9 113.75,21 113.25,21
N$4
  Top 0.25: IC3.33 116.25,11.25 116.5,11 | 116.5,11 116.75,10.75 117.75,10.75 | 117.75,10.75 118,10.5 R15.2 | IC3.36 117.75,10.75 | IC3.34 116.75,11.25 116.5,11
N$6
  Top 0.305: R3.1 C14.1
N$7
  Top 0.305: R4.1 C15.1
N$8
  Top 0.25: IC3.17 109.25,16.75 109,17 101.85,17 R2.2 101.48,17.35 Q1.2 93.48,21.33 C11.1
N$9
  Top 0.305: R5.1 C16.1
N$10
  Top 0.25: IC3.18 109.25,16.25 109,16 101.85,16 R2.1 101.48,15.65 Q1.1 92.52,11.67 C12.1
N$11
  Top 0.25: IC3.3 116.75,20.9 R7.2
N$13
  Top 0.254: LED2.C 23.49,55.25 R24.1
N$14
  Top 0.254: R23.1 23.59,59.06 LED1.C
N$16
  Top 0.305: IC2.17 142.93,68.78 C18.2
N$17
  Top 0.305: IC2.16 143.57,63.42 145.8,61.2 X1.2
N$18
  Top 0.305: IC2.15 144.22,64.78 147,62 X1.3
N$19  (via drill 0.4)
  Top 0.305: X1.1 148.4,60.4 v148,60
  Top 0.406: R9.1 148.85,63.85 v148,63
  Bottom 0.305: v148,60 v148,63
N$20
  Top 0.305: R10.2 147.15,69.85 146,71 143,71 141.62,69.62 IC2.19
  Top 0.406: R9.2 R10.2
N$21
  Top 0.406: IC1.13 76.35,46.65 80,43 Q2.2 83.85,42.98 C21.1
N$22
  Top 0.406: IC1.12 73.81,43.36 Q2.1 74.17,38.02 C22.1
N$24
  Top 0.25: IC3.25 112.25,11.25 112,11 R17.2
N$25
  Top 0.305: R20.1 R21.1 37.93,13.15 U1.1
N$26
  Top 0.406: R18.1 R19.1 56.93,13.15 U2.1
RESET
  Top 0.305: U3.P$5 11.73,82.48 J1.5
RIGHT  (via drill 0.4)
  Top 0.25: IC3.39 120.5,14.25 122.25,12.5
  Top 0.305: 122.25,12.5 130.65,12.5 R4.2 131.15,11.85 132,11 146,11 v150,15
  Bottom 0.305: v150,15 150,18 152,20 154.4,20 X3.2
RX
  Top 0.254: U3.P$12 14,68.48 11.92,66.4 11.92,64.89 J1.12
S_CAP
  Top 0.305: U3.P$8 13.35,76.48 J1.8
SCK  (via drill 0.4)
  Top 0.305: IC4.5 63.37,32.63 63,33 v63,40 | 63,42 63,48.73 IC1.8
  Top 0.31: v63,40 63,42
  Bottom 0.406: JP3.3 39.73,39.23 41,40.25 62.5,40.25 v63,40
SCK_3V  (via drill 0.4)
  Top 0.25: IC3.28 113.75,4.75 113,4 v72,4
  Top 0.305: IC4.4 68.64,31.36 69,31 70,31 | X2.5 131.86,40.86 131,40 131,36 127,32 110,32 109,33
  Top 0.31: 109,33 v72,33 | 70,31 v72,31
  Bottom 0.25: v72,4 v72,31 v72,33
SD_!CS  (via drill 0.4)
  Top 0.25: 74,31 73,32 68,32 66.09,33.91 IC4.6
  Top 0.305: v129,31 128,30 108,30 107,31 | v135,31 137,31 139,33 139,37 139.56,37.56
  Top 0.31: X2.2 139.56,37.56 | 107,31 74,31
  Bottom 0.305: v129,31 v135,31
SD_!CS!_I
  Top 0.305: IC1.5 56.03,51.03 57,52 64,52 65,51 65,39 67,37 67,35 | 67,35 65.25,35 IC4.7 | R14.2 67.5,34.5 67,35
SEN0
  Top 0.254: U3.P$34 35.51,88.48 J2.1
SEN1
  Top 0.254: U3.P$30 37.67,80.48 J2.5
SEN2
  Top 0.254: U3.P$31 37.13,82.48 J2.4
SEN3
  Top 0.254: U3.P$32 36.59,84.48 J2.3
SEN4
  Top 0.305: U3.P$2 10.43,88.48 J1.2
SEN5
  Top 0.305: U3.P$3 10.65,86.48 J1.3
SEN6
  Top 0.305: U3.P$1 11.84,90.48 11.16,91.16 10.29,91.16 J1.1
SEN7
  Top 0.305: U3.P$4 11.19,84.48 J1.4
SENSE-PWR
  Top 0.254: U3.P$33 36.05,86.48 J2.2
SW_0  (via drill 0.4)
  Top 0.406: IC1.40 45.87,76.87 49,80 v149,80
  Bottom 0.406: SV1.1 150.08,96.08 149,95 148.8,94.8 148.8,93.1 149,92.9 v149,80
SW_1  (via drill 0.4)
  Top 0.406: IC1.39 48.41,76.41 51,79 v150,79
  Bottom 0.406: SV1.2 150.08,79.08 v150,79
SW_2  (via drill 0.4)
  Top 0.406: IC1.38 50.95,75.95 53,78 v147,78
  Bottom 0.406: SV1.3 147.52,96.27 146.25,95 146.25,92.75 147,92 v147,78
SW_3  (via drill 0.4)
  Top 0.406: IC1.37 53.49,75.49 55,77 v148,77
  Bottom 0.406: SV1.4 147.54,92.46 148,92 v148,77
SW_4  (via drill 0.4)
  Top 0.406: IC1.36 56.03,74.03 58,76 v145,76
  Bottom 0.406: SV1.5 145,96 143.75,94.75 143.75,91.25 145,90 v145,76
SW_5  (via drill 0.4)
  Top 0.406: IC1.35 58.57,73.57 60,75 v146,75
  Bottom 0.406: SV1.6 145,92 146,91 v146,75
SW_6  (via drill 0.4)
  Top 0.406: IC1.34 61.11,72.11 63,74 v143,74
  Bottom 0.406: SV1.7 142.46,96.21 141.25,95 141.25,89.75 143,88 v143,74
SW_7  (via drill 0.4)
  Top 0.406: IC1.33 63.65,70.65 66,73 v144,73
  Bottom 0.406: SV1.8 142.46,90.54 144,89 v144,73
SW_A
  Top 0.406: SW2.B@1 SW2.B@2
  Bottom 0.406: SW2.B@2 172.54,79.54 174,81 174,93 174.2,93.2 174.2,95.01 SV2.7
SW_B
  Top 0.406: SW3.B@1 SW3.B@2
  Bottom 0.406: SW3.B@1 182,81 182,88 185,91 185,94.35 SV2.1
SW_C
  Top 0.406: SW4.B@2 SW4.B@1
  Bottom 0.406: SW4.B@1 184.35,61.65 181,65 181,89 183,91 183,93.65 SV2.2
SW_D
  Top 0.406: SW5.B@1 SW5.B@2
  Bottom 0.406: SW5.B@2 172.54,49.54 175,52 175,93.27 SV2.8
SW_E
  Top 0.406: SW6.B@1 SW6.B@2
  Bottom 0.406: SW6.B@1 183.46,52.54 180,56 180,90 181.8,91.8 181.8,95.01 SV2.3
SW_F
  Bottom 0.406: SW1.A 175.5,17.5 177,19 177,49 178,50 178,91.7 179.2,92.9 179.2,95.1 179.1,95.2 179,95.27 SV2.5
SW_G
  Bottom 0.406: SW1.B 180.5,18.5 179,20 179,91 180,92 180,93.19 SV2.4
SW_H
  Bottom 0.406: SW1.P1 175.5,49.5 177,51 177,92.73 SV2.6
TX
  Top 0.254: U3.P$13 14.24,64.67 J1.13
VDD-BATT
  Top 0.61: J2.15 34.22,59.61 JP5.1 31.86,59.8 28.3,63.35 28.3,64.42 U3.P$20
VDD-IN  (via drill 0.51)
  Top 0.254: v33.38,53.7 32.95,53.26 JP6.1 JP5.2
  Top 0.61: J2.14 37.05,58.16 33.64,61.57 31.86,61.57 30.34,63.1 30.34,64.38 U3.P$21
  Bottom 0.254: v33.38,53.7 33.75,53.7 J2.14
VS_!CS  (via drill 0.4)
  Top 0.25: IC3.23 104.75,13.75 102,11 102,8 101,7 71,7 v70,8
  Top 0.305: IC4.10 60.83,35.17 61,35 61,27 62,26 69,26 v70,25
  Bottom 0.25: v70,8 v70,25
VS_!CS!_I
  Top 0.305: IC1.4 53.49,39.51 55,38 56.55,36.45 IC4.9
  Top 0.31: R13.2 55,38
VS_!DCS  (via drill 0.4)
  Top 0.25: IC3.13 110.25,18.75 v109.25,19.75
  Top 0.305: IC4.12 52.63,32.63 52,32 52,27 56,23 69,23
  Top 0.31: v101,29 94,29 88,23 69,23
  Bottom 0.25: v109.25,19.75 v101,29
VS_!DREQ  (via drill 0.4)
  Top 0.25: IC3.8 114.25,21.5 113,21.5 v112,22.5
  Top 0.305: IC1.2 48.41,28.59 56,21 66,21
  Top 0.31: 66,21 v73,21 | v73,30 v102,30
  Bottom 0.25: v112,22.5 108.75,22.5 v102,30 | v73,21 v73,30
VS_RXD
  Top 0.25: IC3.26 112.75,9.75 112,9 R6.1 106.46,8.11 JP2.1
VS_TXD
  Top 0.25: IC3.27 113.25,9.25 112,8 110,8 109,7 JP2.2

## Text on the board
Top: Sebastians Küchenradio MP3 | sb@thebackend.de | Rev. B
Bottom: 6/17/10
tPlace: RN-131g Breakout | VDD-BATT | PIO4 | 3.3V OUT | VDD-IN | 3.3 | IN | VDD-IN | GND | PIO6 | PIO9
bPlace: SENSE-6 | SENSE-0 | SENSE-4 | SENSE-PWR | SENSE-5 | SENSE-3 | SENSE-7 | SENSE-2 | RESET | SENSE-1 | EPC-A | GPIO-4 | EPC-B | GPIO-5 | SUPERCAP | GPIO-6 | F-AWAKE | GPIO-7 | GPIO-13 | GPIO-8 | GPIO-12 | GPIO-9 | RX | DMA-RX | TX | DMA-TX | MOSI | VDD-IN | CLK | VDD-BATT | MISO | GND | 3.3V-ROUT | 3.3V-RIN